# Altium PCB PCB1.PcbDoc
Units mil, origin at the board's own origin, x right, y up, seen from the top; angles counter-clockwise.
Board outline 1820 x 1125 mil, 2 copper layers (Top Layer, Bottom Layer); 6 components, 12 nets, 15 pads, 0 vias.
Unrouted connection lines stored in the file: 7.
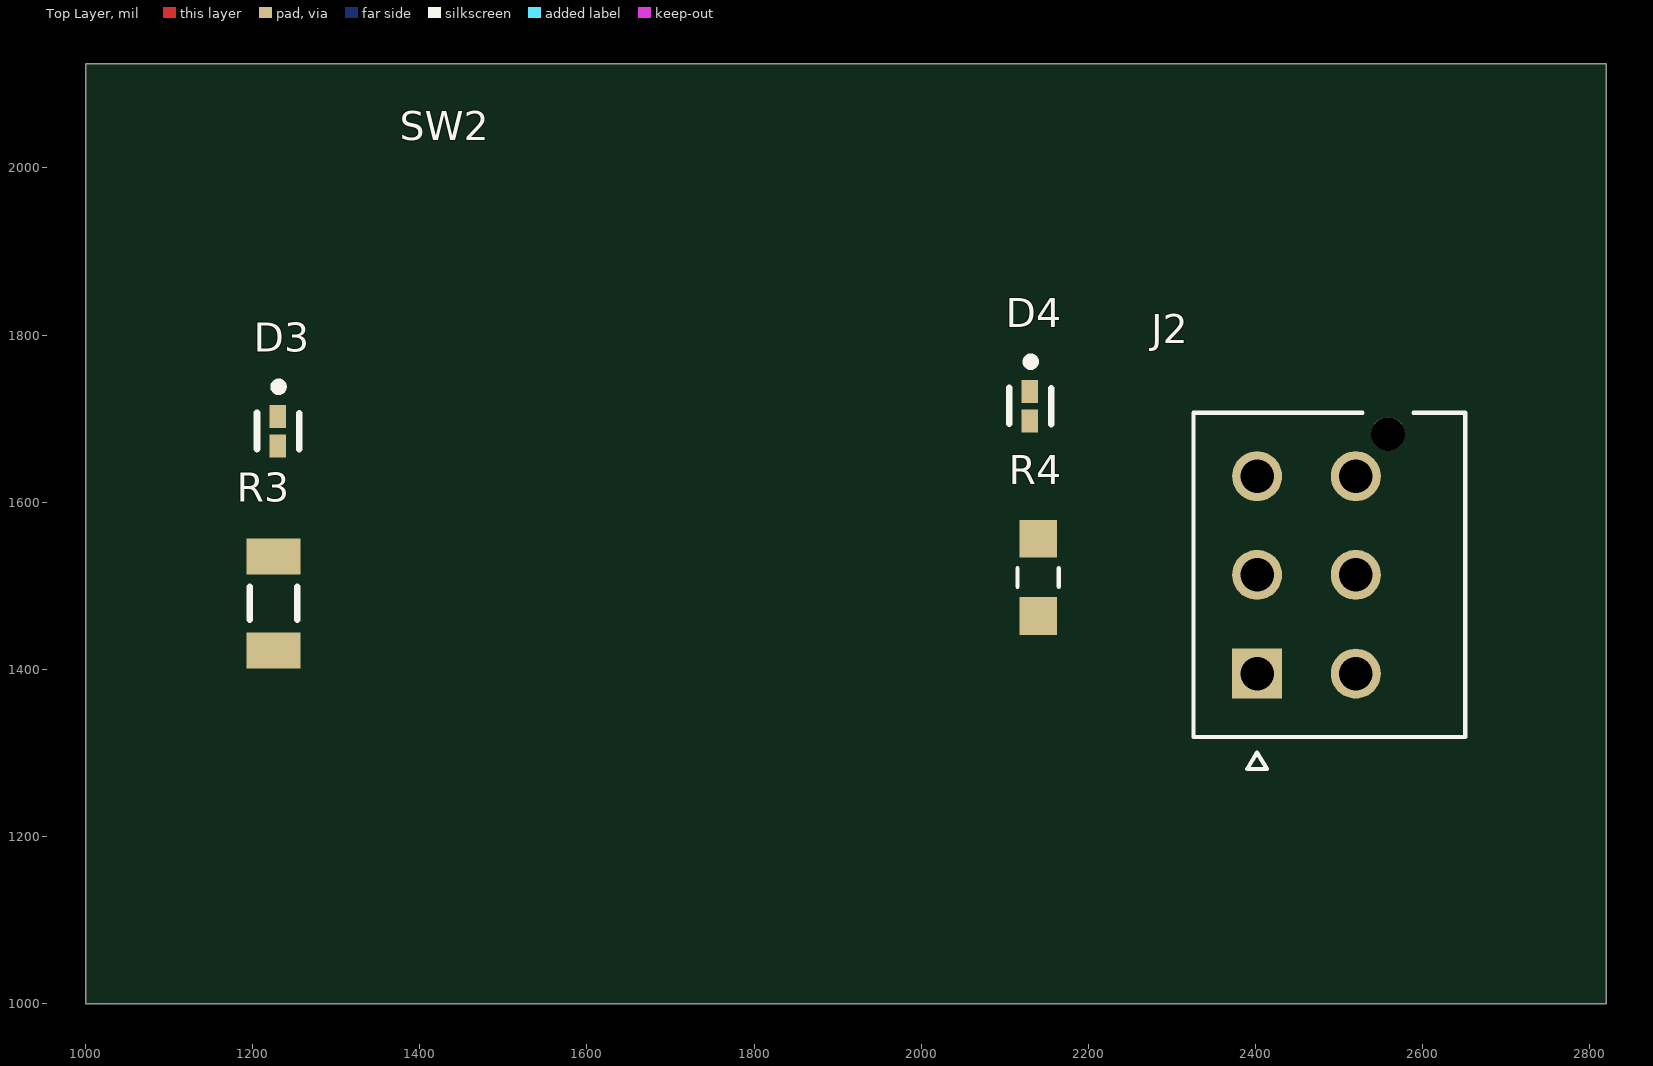
[diagram p0: Top Layer view]
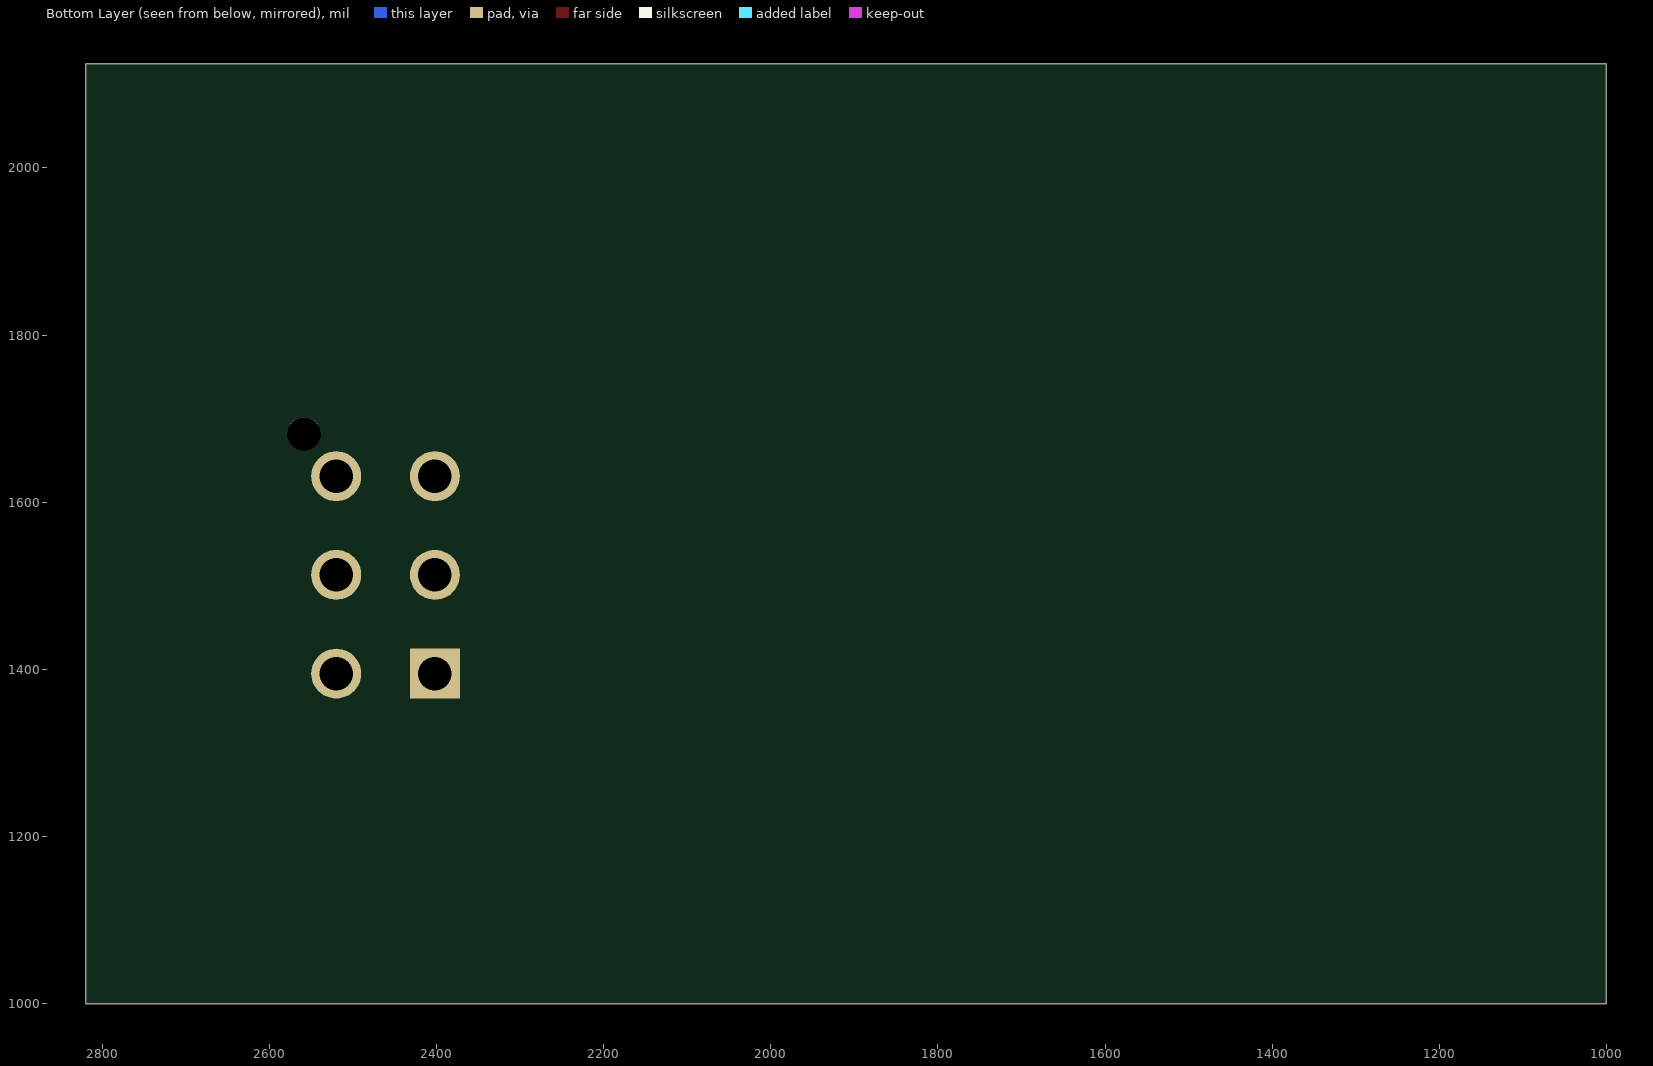
[diagram p1: Bottom Layer view, seen from below]

## Layer stack, top to bottom
Top Solder: solder mask 0.4, Solder Resist, Dk 3.5
Top Layer: signal copper 1.4
Dielectric 1: dielectric 12.6, FR-4, Dk 4.8
Bottom Layer: signal copper 1.4
Bottom Solder: solder mask 0.4, Solder Resist, Dk 3.5

## Board outline
1000,1000 2820,1000 2820,2125 1000,2125

## Design rules (kind name [scope] priority, off if disabled: settings)
Clearance [All] p1: gap=10 ignorepadtopadclearanceinfootprint=FALSE except(0: Arc-Hole Track-Hole SMDPad-Hole THPad-Hole Via-Hole Fill-Hole Poly-Hole Region-Hole Text-Hole)
PolygonConnect [All] p1: connectstyle=Relief reliefconductorwidth=10 reliefentries=4 polygonreliefangle="90 Angle" airgapwidth=10
RoutingVias [All] p1: holewidth=28 width=50 viastyle="Through Hole" minholewidth=28 minwidth=50 maxholewidth=28 maxwidth=50
SolderMaskExpansion [All] p1: expansion=4 istentingtop=FALSE
Width [All] p1: maxlimit=10 minlimit=10 preferedwidth=10
30 further rules are at their usual default settings.

## Classes and differential pairs
component class Sheet1: D3 D4 R3 R4 SW2

## Components (designator, comment, footprint, x,y, rotation, side; value= is the part's Value field where it differs from the comment)
D3 "LED7.4" FP-APHHS1005CGCK-MFG 1230,1685 r270 top
D4 "LED3.3" FP-APHHS1005CGCK-MFG 2130,1715 r270 top
J2 "2068320601" MOLEX_2068320601 2401.89,1395 r270 top
R3 "261R" RESC3216X70X50NL05T20 1225,1478.9 r90 top
R4 "59R" RES_ERJP06F59R0V 2140,1510 r270 top
SW2 "PRASD3-16F-BB000" FP-PRASD3-16F-BB000-MFG 1685,1560 r90 top

## Footprints (in the part's own frame and the unit in brackets; to place one, negate y for a bottom-side part, rotate by r counter-clockwise, add the part's x,y. Pads: shape width x height; smd on the part's side, far side on the other; paste and mask are expansions set on the pad)
FP-APHHS1005CGCK-MFG [mm]
  rect 0.7x0.5 smd paste+0 mask+0: 1(-0.45,0) 2(0.45,0)
  silkscreen extent -1.47,-0.63 0.55,0.65, body extent -0.9,-0.4 0.9,0.4, height 0.25
FP-PRASD3-16F-BB000-MFG [mil]
  body extent -437,-305 437,305, height 10
MOLEX_2068320601 [mm]
  rect 1.52x1.52 hole 1.02 mask+0.076: 1(0,0)
  round 1.52 hole 1.02 mask+0.076: 2(-3,0) 3(-6,0) 4(0,3) 5(-3,3) 6(-6,3)
  round 1.02 hole 1.02 unplated mask+0.076: ""(-7.28,3.98)
  silkscreen extent -7.93,-1.93 2.9,6.33
RES_ERJP06F59R0V [mm]
  rect 1.15x1.15 smd: 1(-1.175,0) 2(1.175,0)
  silkscreen extent -0.28,-0.63 0.28,0.63
RESC3216X70X50NL05T20 [mm] "Chip Resistor, 2-Leads, Body 3.20x1.60mm, IPC Medium Density"
  rect 1.1x1.65 smd: 1(-1.425,0) 2(1.425,0)
  silkscreen extent -0.5,-0.72 0.5,0.72, body extent -1.63,-0.82 1.62,0.82, height 0.7

## Part data
D3 D4: library part CMP-44529-000044-1, "LED GREEN CLEAR CHIP SMD", Case Code (Imperial)=0402, Case Code (Metric)=1005, Color=Green, Forward Current=20mA, Forward Voltage=2.1V, Lens Color=Clear, Max Operating Temperature=85°C, Min Operating Temperature=-40°C, Package Quantity=2000, Case/Package=0402, Dominant Wavelength=570nm, Height=0.6mm, Illumination Color=Green, Lead Free="Lead Free", Length=1mm, Lens Style=Clear, Luminous Intensity=50mcd, Mount="Surface Mount", Number of LEDs=1, Number of Pins=2, Packaging="Tape and Reel", Test Current=20mA, Viewing Angle=120°, Wavelength=570nm, Width=0.5mm
J2: Package=None, Availability=Unavailable, MP=2068320601, Price=None
R3: library part CMP-2003-00255-1, Manufacturer=Panasonic, Part Number=ERJ-8ENF2610V
R4: library part ERJP06F59R0V, Package=None, Availability=Unavailable, MP=ERJP06F59R0V, Price=None
SW2: library part CMP-03403-000007-1, "SWITCH ROCKER SPDT 16A 125V", Actuator Color=Black, Contact Current Rating=16A, Contact Resistance=100mR, Max Operating Temperature=85°C, Max Voltage Rating (AC)=250V, Min Operating Temperature=-20°C, Package Quantity=100, Ratings="Dust Proof", Voltage Rating (AC)=125V, Actuator Material=Nylon, Actuator Type=Rocker, Color=Black, Contact Material=Tin, Contact Plating=Silver, Current Rating=16A, Depth=15mm, Electrical Life=6000Cycles, ELV=Compliant, Housing Material=Nylon, Lead Free="Not Applicable", Max Current Rating=16A, Mechanical Life=100000Cycles, Mount=Panel, Orientation=Straight, Packaging=Tray, Radiation Hardening=No, RoHS Compliant=Yes, Series=PRA, Switch Function=On-Off-On, Termination="Quick Connect", Throw Configuration=SPDT, Type=Switch, VDE Tested=Yes

## Nets (pads, with @x,y where several pads share a name; then routed paths per layer and width w, separated by ;. In a path a pad name is that pad's centre, name@x,y a point inside that pad or via, vN(x,y) a via of type N, cw(c..) or ccw(c..) an arc to the next point about the centre after c; other vN are vias at no path point)
NetD1_1: 
NetD1_2: 
NetD2_2: 
NetD3_1: D3.1 D4.1 J2.4 J2.5
NetD3_2: D3.2 R3.2
NetD4_2: D4.2 R4.1
NetJ1_1: 
NetJ1_2: 
NetJ1_3: 
NetJ1_6: 
NetJ2_1: J2.1 R3.1
NetJ2_2: J2.2 R4.2
pads on no net: J2. J2.3 J2.6